# Altium PCB PCB_Anchor.PcbDoc
Units mm, origin at the board's own origin, x right, y up, seen from the top; angles counter-clockwise.
Board outline 47.5 x 51.3 mm, 2 copper layers (Top Layer, Bottom Layer), stack 1.671 mm thick; 35 components, 30 nets, 183 pads, 60 vias.
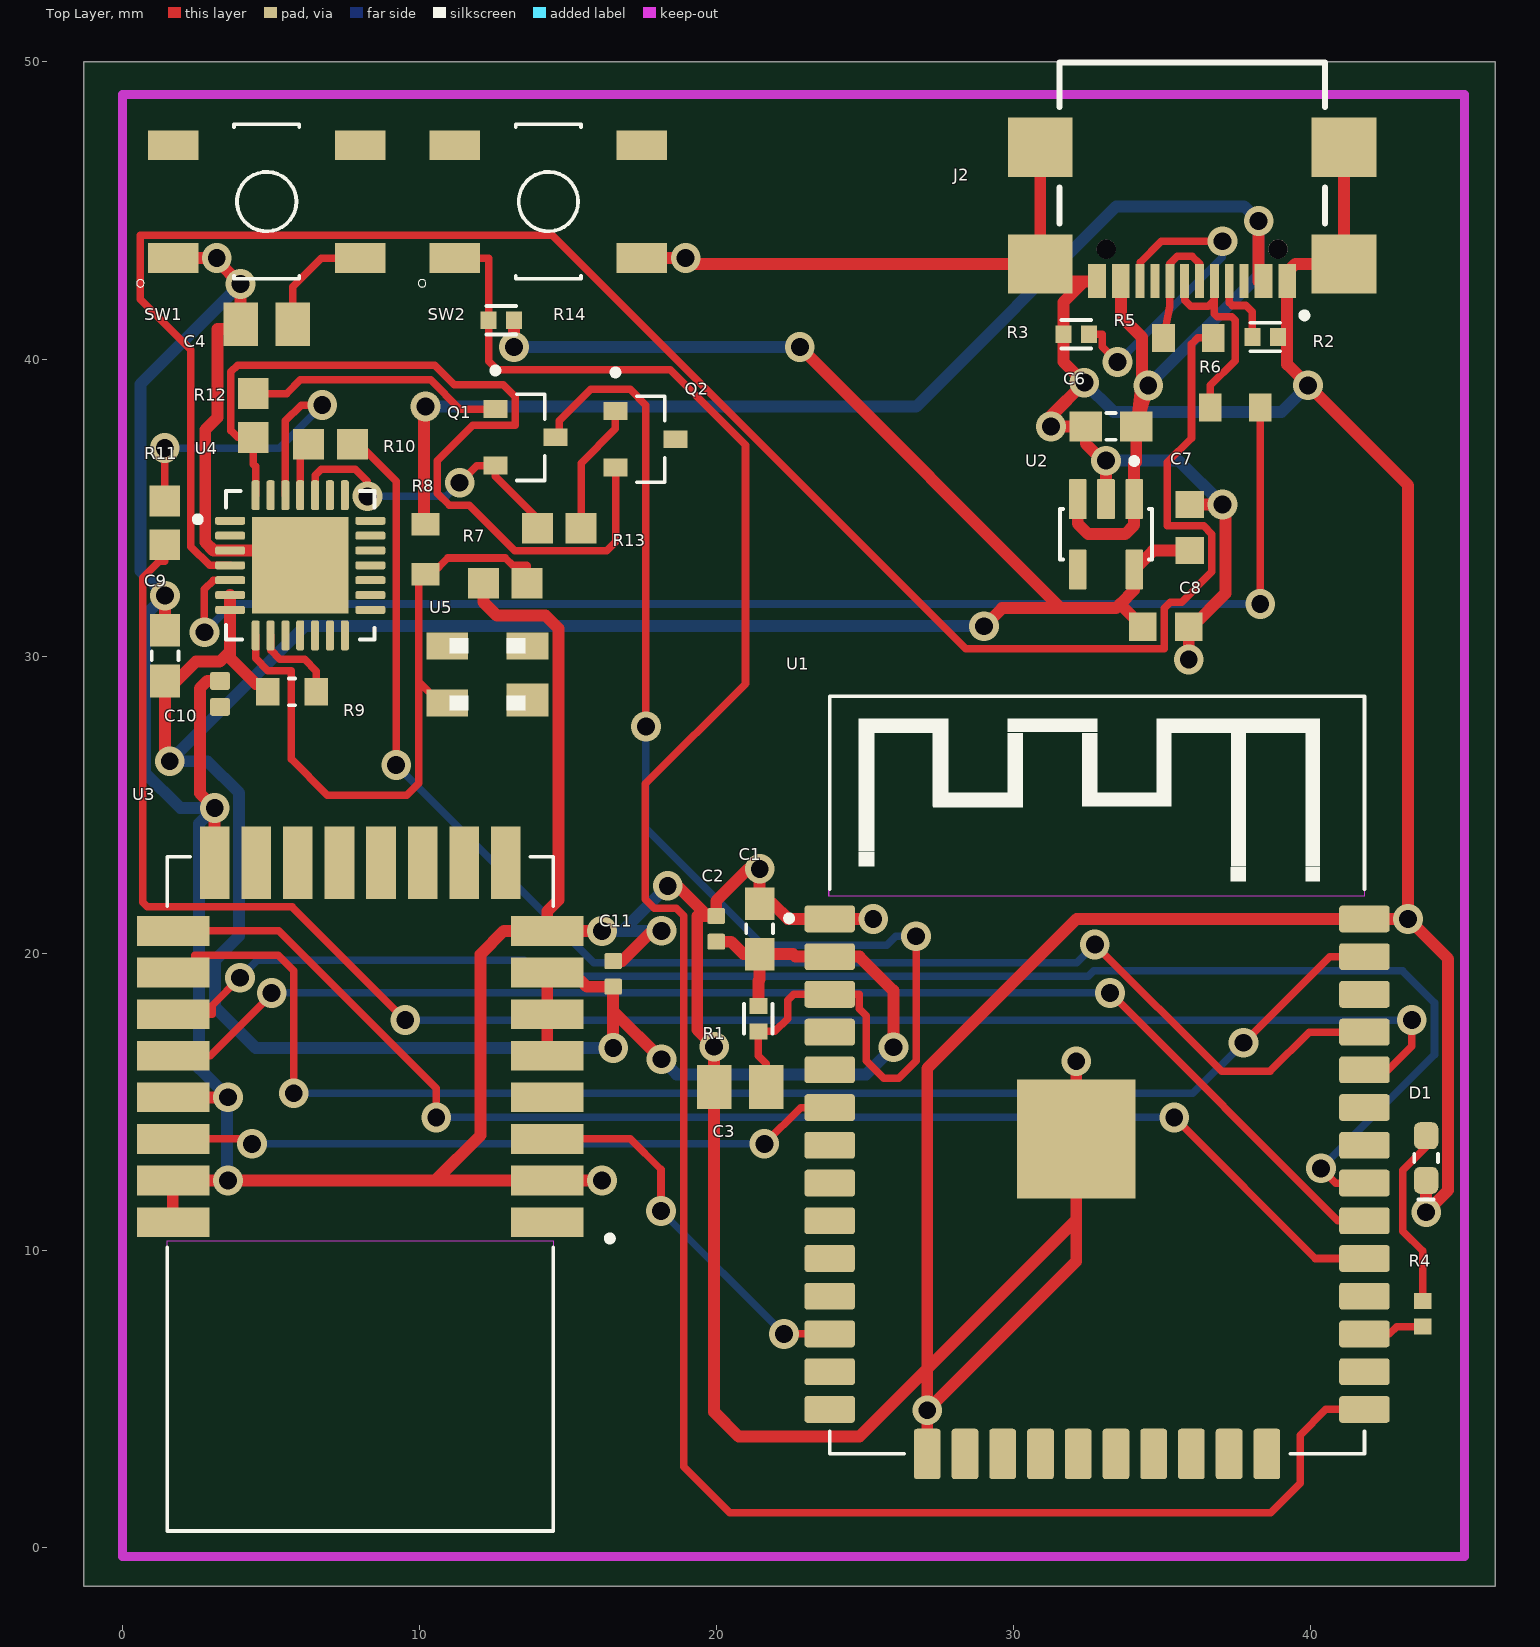
[diagram p0: Top Layer view]
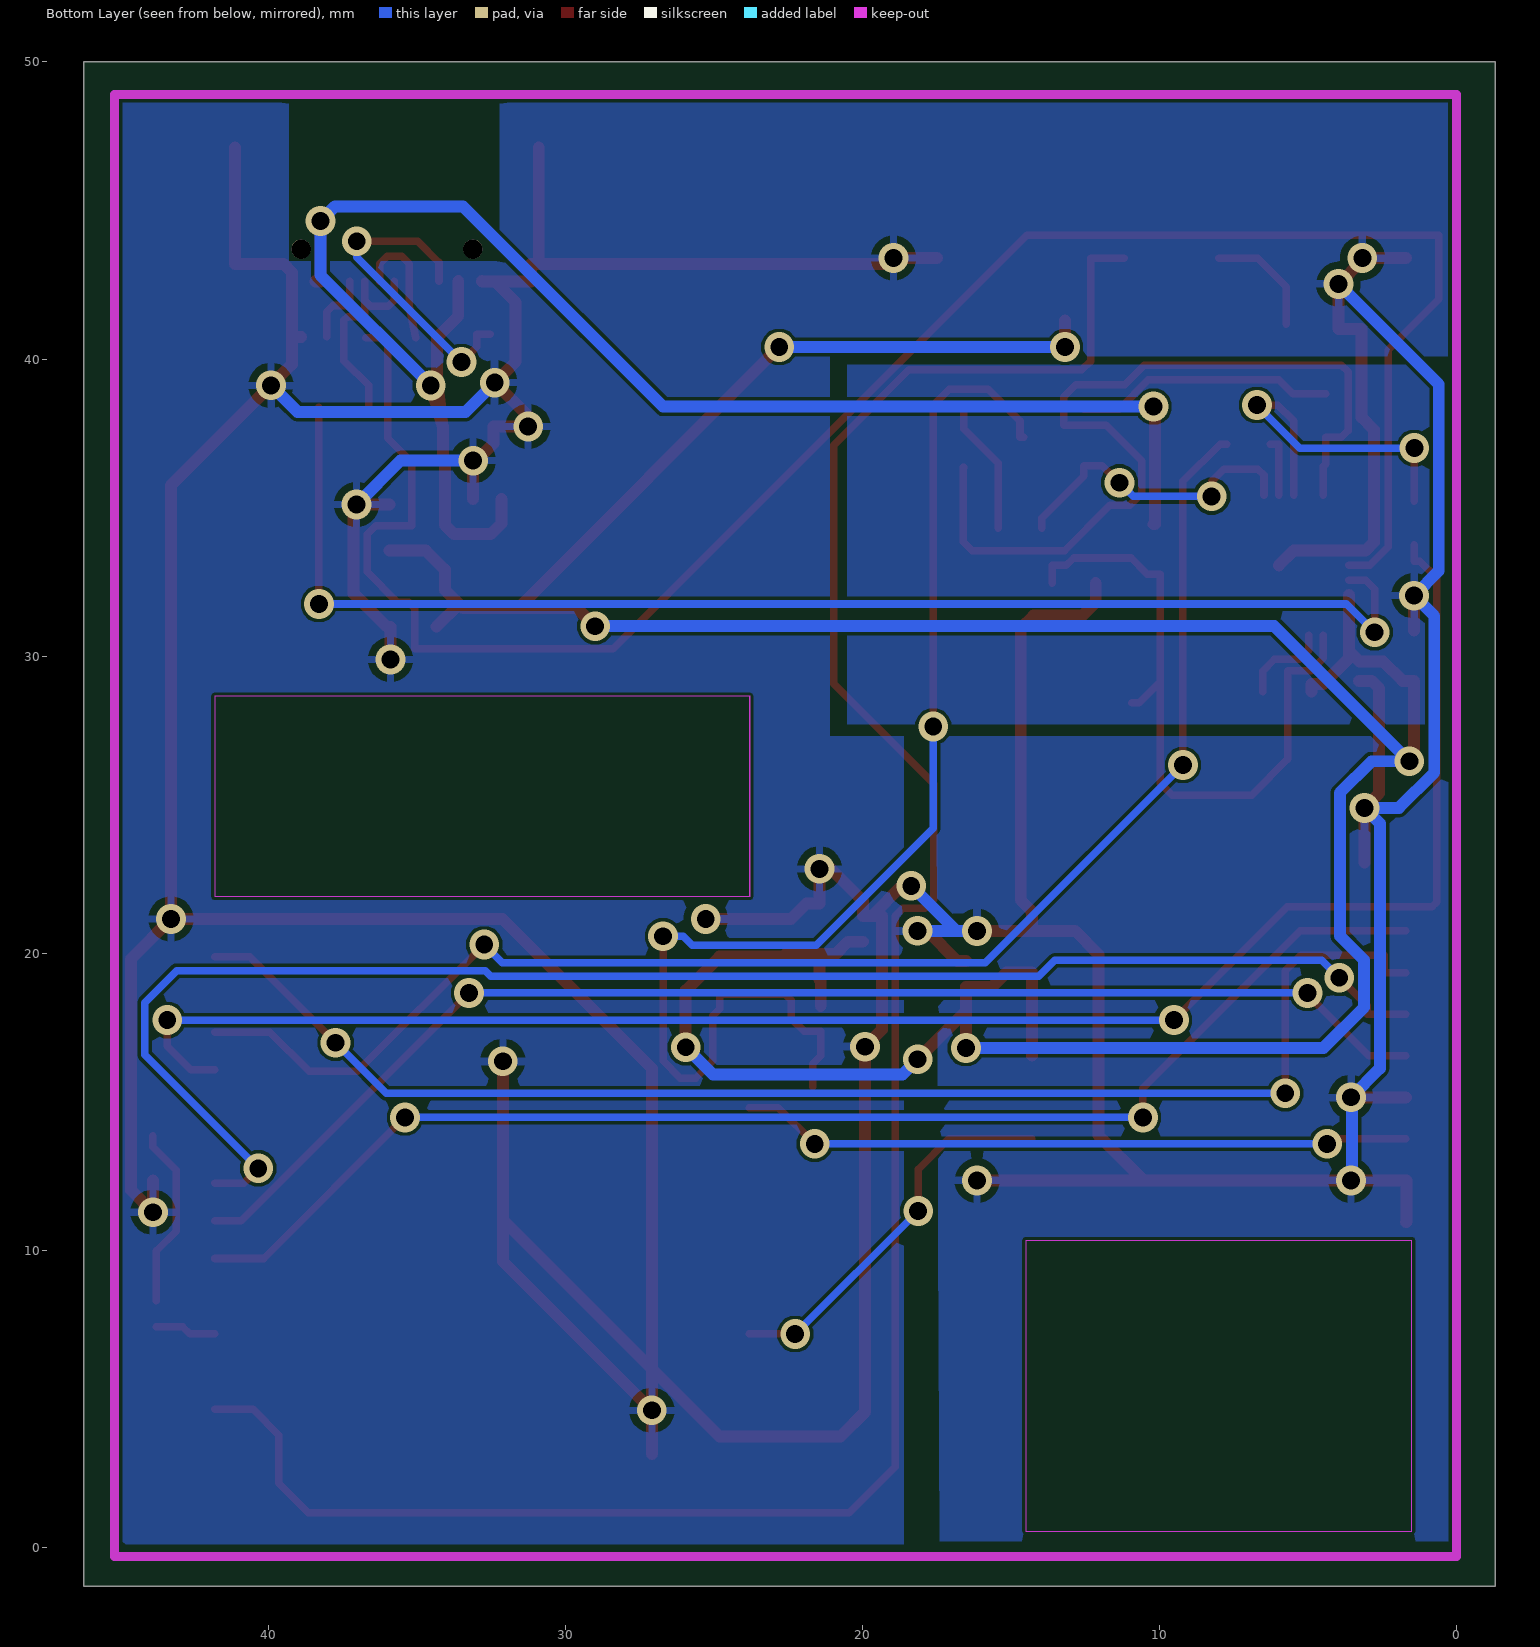
[diagram p1: Bottom Layer view, seen from below]
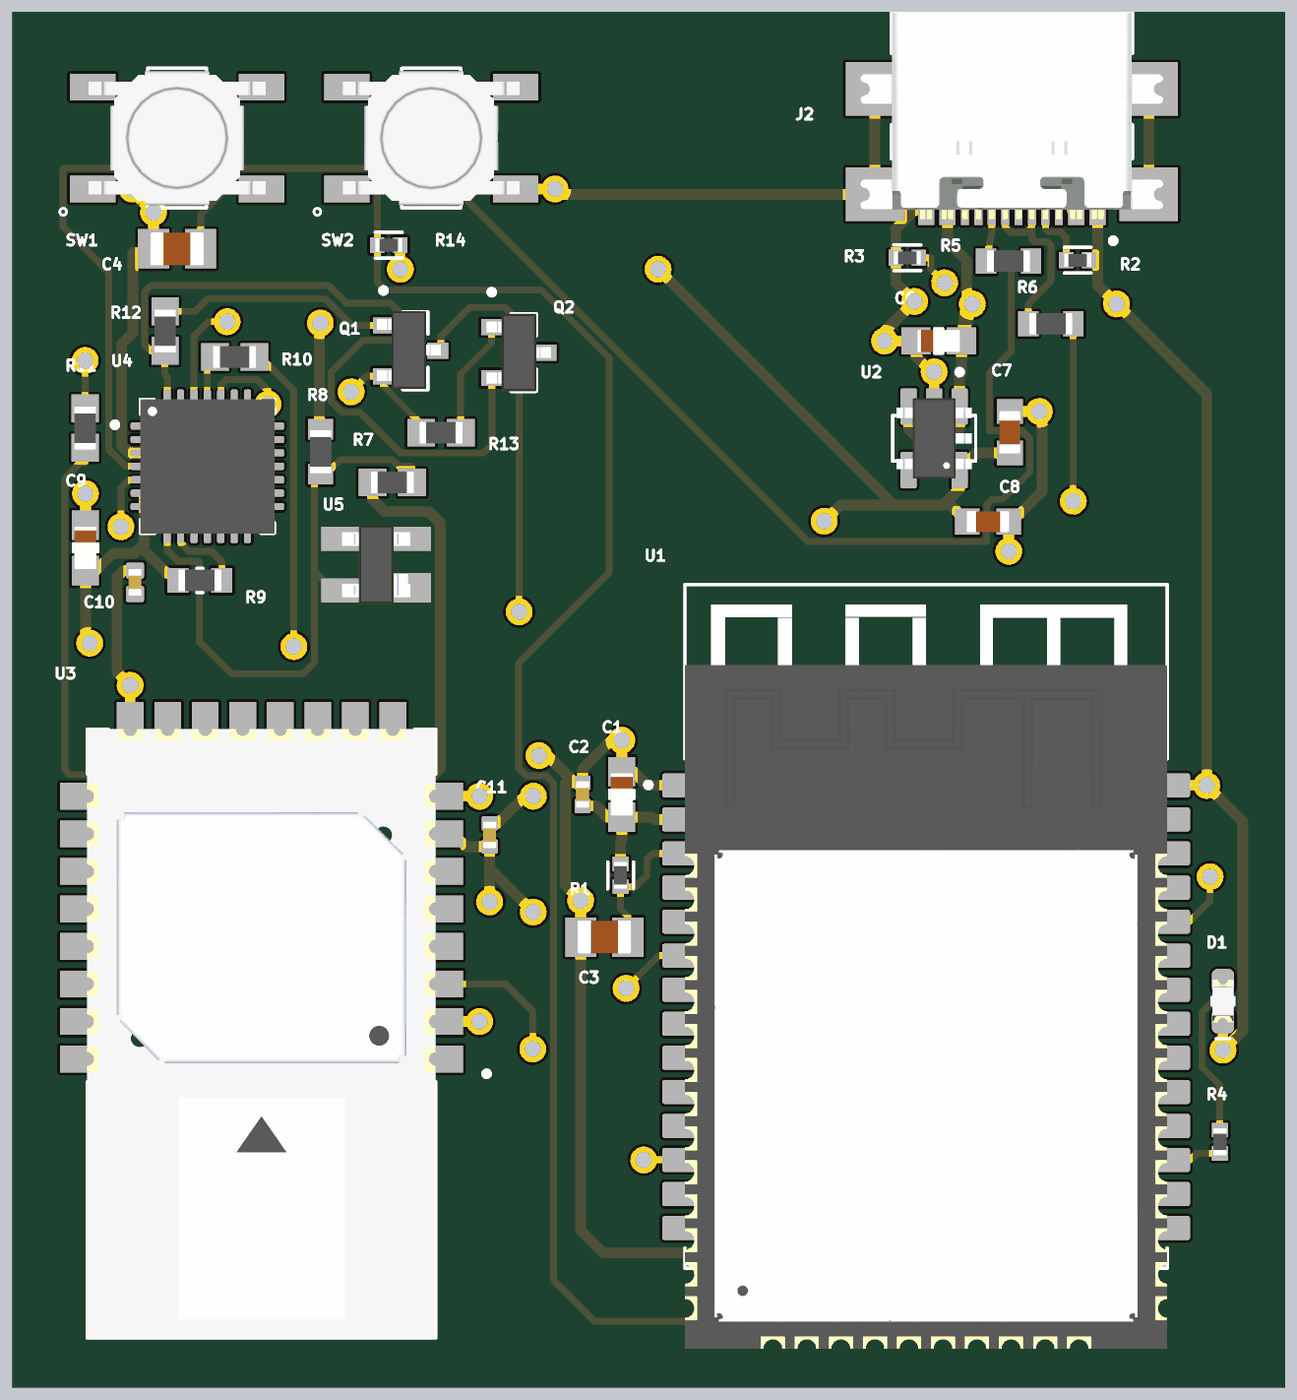
[diagram p2: 3D render of the assembled board from above, using the file's embedded part models]

## Layer stack, top to bottom
Top Solder: solder mask 0.0102, Solder Resist, Dk 3.5
Top Layer: signal copper 0.0356
Dielectric1: core 1.6, FR-4, Dk 4.8
Bottom Layer: signal copper 0.0356
Bottom Solder: solder mask 0.0102, Solder Resist, Dk 3.5

## Board outline
-1.3,-1.3 46.2,-1.3 46.2,50 -1.3,50

## Design rules (kind name [scope] priority, off if disabled: settings)
BoardOutlineClearance [All] p1: gap=0.12 ignorepadtopadclearanceinfootprint=FALSE except(0: Arc-SplitContinuation Track-SplitContinuation SMDPad-SplitContinuation THPad-SplitContinuation Via-SplitContinuation Fill-SplitContinuation Poly-SplitContinuation Region-SplitContinuation Text-SplitContinuation)
Clearance [All] p1: gap=0.12 ignorepadtopadclearanceinfootprint=FALSE except(0: Arc-Hole Track-Hole SMDPad-Hole THPad-Hole Via-Hole Fill-Hole Poly-Hole Region-Hole Text-Hole)
DiffPairsRouting DiffPair_USB_DATADiffPairsRouting [InDifferentialPairClass('USB_DATA')] p1: maxlimit=0.254 minlimit=0.254 mostfreqgap=0.254 toplayer_minwidth=0.381 toplayer_maxwidth=1.27 toplayer_prefwidth=1.27 bottomlayer_minwidth=0.381 bottomlayer_maxwidth=1.27 bottomlayer_prefwidth=1.27 maxuncoupledlength=12.7
DiffPairsRouting [All] p2: maxlimit=0.254 minlimit=0.254 mostfreqgap=0.254 toplayer_minwidth=0.381 toplayer_maxwidth=0.381 toplayer_prefwidth=0.381 bottomlayer_minwidth=0.381 bottomlayer_maxwidth=0.381 bottomlayer_prefwidth=0.381 maxuncoupledlength=12.7
HoleSize HoleSize_1 [InPadClass('Mounting_Holes')] p1: absolutevalues=TRUE maxlimit=3 minlimit=0.025 maxpercent=80.000 minpercent=20.000
HoleSize Mounting_Holes [All] p2: absolutevalues=TRUE maxlimit=2.54 minlimit=0.025 maxpercent=80.000 minpercent=20.000
MatchedLengths DiffPair_USB_DATAMatchedLengths [InDifferentialPairClass('USB_DATA')] p1: tolerance=3.048 checknetsindiffpair=TRUE checkdiffpairvsdiffpair=FALSE checkxsignals=FALSE checkothers=FALSE
MinimumSolderMaskSliver [All] p1: minsoldermaskwidth=0
PolygonConnect [All] p1: connectstyle=Relief reliefconductorwidth=0.254 reliefentries=4 polygonreliefangle="90 Angle" airgapwidth=0.254
RoomDefinition U_ESP32_Module_Anchor [InComponentClass('U_ESP32_Module_Anchor')] p1: confinementstyle=ConfineIn formatcopy=TRUE lockcomponents=FALSE outline 0.2,50.5 0.2,39.9 21,39.9 21,27.4 18.5,27.4 18.5,0 44.9,0 44.9,50.7
RoomDefinition U_USB_to_UART [InComponentClass('U_USB_to_UART')] p2: confinementstyle=ConfineIn formatcopy=TRUE lockcomponents=FALSE outline 0.291,27.585 20.54,27.585 20.54,39.895 0.291,39.986
RoomDefinition U_DWM3000_Anchor [InComponentClass('U_DWM3000_Anchor')] p3: confinementstyle=ConfineIn formatcopy=TRUE lockcomponents=FALSE outline 0.095,0.15 17.5,0.15 17.5,27.35 0.095,27.35
RoutingVias [All] p1: holewidth=0.6 width=1 viastyle="Through Hole" minholewidth=0.6 minwidth=1 maxholewidth=0.711 maxwidth=1.27
ShortCircuit ShortCircuit_ADG [InNet('AGND') vs InNet('DGND')] p1 off: allowed=TRUE
ShortCircuit [All] p2: allowed=FALSE
SilkToSolderMaskClearance SilkscreenOverComponentPads [IsPad] p1 off: minsilkscreentomaskgap=0.254 clearancetoexposedcopper=TRUE
SolderMaskExpansion [All] p1: expansion=0.102 istentingtop=FALSE
SupplyNets "Schematic Supply Nets" [InNet('V_USB')] p1: voltage=0.000
SupplyNets "Schematic Supply Nets_3" [InNet('+3.3V')] p2: voltage=0.000
SupplyNets "Schematic Supply Nets_1" [InNet('GND')] p3: voltage=0.000
Width Width_Power [InNetClass('Power')] p1: maxlimit=0.6 minlimit=0.3 preferedwidth=0.4 minimp=50.000000 maximp=50.000000 favimp=50.000000
Width [All] p2: maxlimit=0.254 minlimit=0.254 preferedwidth=0.254
25 further rules are at their usual default settings.

## Classes and differential pairs
net class Power: +3.3V GND V_USB
component class U_USB_to_UART: C9 C10 Q1 Q2 R7 R8 R9 R10 R11 R12 R13 U4 U5
component class U_ESP32_Module_Anchor: C1 C2 C3 C4 C6 C7 C8 D1 J2 R1 R2 R3 R4 R5 R6 R14 SW1 SW2 U1 U2
component class U_DWM3000_Anchor: C11 U3

## Components (designator, comment, footprint, x,y, rotation, side; value= is the part's Value field where it differs from the comment)
C1 "Cap" CAPC1608X90 21.444,20.82 r270 top value=10uF
C2 "Cap" CAPC1005X55N 19.982,20.82 r270 top value=100nF
C3 "Cap" CAPC2012X94N 20.791,15.499 r0 top value=0.1uF/50V(10%)
C4 "Cap" CAPC2012X94N 4.85,41.169 r0 top value=0.1uF/50V(10%)
C6 "Cap" CAPC1608X90 33.27,37.732 r0 top value=10uF
C7 "Cap" CAPC1608X87N 35.919,34.328 r270 top value=10nF
C8 "Cap" CAPC1608X87N 35.11,30.991 r180 top value=10nF
C9 "Cap" CAPC1608X90 1.43,30.016 r270 top value="0.1uF/50V (10%)"
C10 "Cap" CAPC1005X65N 3.28,28.729 r270 top value="4.7uF/6.3V (10%)"
C11 "Cap" CAPC1005X55N 16.514,19.306 r270 top value=0.1uF
D1 "597-3326-607F" LEDSC160X80X70L45N 43.877,13.107 r90 top
J2 "USB4110GFA" GCT_USB4110GFA 36,43.7 r180 top
Q1 "SS8050-G" TRANS_SS8050-G 13.56,37.365 r0 top
Q2 "SS8050-G" TRANS_SS8050-G 17.6,37.3 r0 top
R1 "Res1" RESC1005X40 21.4,17.8 r90 top value="10k (5%)"
R2 "Res1" RESC1005X40 38.456,40.744 r180 top value=5.1k
R3 "Res1" RESC1005X40 32.098,40.835 r180 top value=5.1k
R4 "Res1" RESC1005X40N 43.762,7.866 r90 top value=220
R5 "Res1" RESC1608X60N 35.875,40.709 r180 top value=27
R6 "Res1" RESC1608X60N 37.453,38.374 r180 top value=27
R7 "Res1" RESC1607X60N 12.88,32.456 r0 top value="47.5k (5%)"
R8 "Res1" RESC1608X60N 10.2,33.6 r270 top value="22.1k (5%)"
R9 "Res1" RESC1608X55N 5.7,28.8 r180 top value="2k (5%)"
R10 "Res1" RESC1607X60N 6.998,37.133 r0 top value="0R (5%)"
R11 "Res1" RESC1607X60N 1.42,34.484 r270 top value="0R (5%)"
R12 "Res1" RESC1607X60N 4.4,38.1 r270 top value="10k (5%)"
R13 "Res1" RESC1607X60N 14.696,34.309 r180 top value="10k (5%)"
R14 "Res1" RESC1005X40 12.748,41.305 r0 top value="10k (5%)"
SW1 "SW-PB" SW_TL3342F160QG 4.85,45.3 r0 top
SW2 "SW-PB" SW_TL3342F160QG 14.333,45.3 r0 top
U1 "ESP-WROOM-32" MODULE_ESP-WROOM-32 32.8,12.9 r0 top
U2 "AP2112K-3.3TRG1" SOT95P285X140-5N 33.1,34.1 r270 top
U3 "DWM3000TR13" XCVR_DWM3000TR13 8,11.9 r180 top
U4 "CP2102N-A01-GQFN28" QFN50P500X500X80-29N 5.98,33.056 r0 top
U5 "SP0503BAHT" SOT143 12.28,29.385 r180 top

## Footprints (in the part's own frame and the unit in brackets; to place one, negate y for a bottom-side part, rotate by r counter-clockwise, add the part's x,y. Pads: shape width x height; smd on the part's side, far side on the other; paste and mask are expansions set on the pad)
CAPC1005X55N [mm]
  rrect25% 0.54x0.6 smd: 1(-0.432,0) 2(0.432,0)
  body extent -0.5,-0.25 0.5,0.25, height 0.55
CAPC1005X65N [mm]
  rrect25% 0.6x0.67 smd: 1(-0.437,0) 2(0.437,0)
  body extent -0.5,-0.25 0.5,0.25, height 0.65
CAPC1608X87N [mm]
  rect 0.92x0.97 smd: 1(-0.775,0) 2(0.775,0)
  body extent -0.8,-0.4 0.8,0.4, height 0.87
CAPC1608X90 [mm]
  rect 1.1x1 smd: 1(-0.85,0) 2(0.85,0)
  silkscreen extent -0.15,-0.45 0.15,0.45, body extent -0.8,-0.43 0.8,0.43, height 1
CAPC2012X94N [mm]
  rect 1.16x1.47 smd: 1(-0.88,0) 2(0.88,0)
  body extent -1,-0.63 1,0.63, height 0.94
GCT_USB4110GFA [mm]
  rect 0.6x1.15 smd: A1/B12(-3.2,1.075) A4/B9(-2.4,1.075) B1/A12(3.2,1.075) B4/A9(2.4,1.075)
  rect 0.3x1.15 smd: A5(-1.25,1.075) A6(-0.25,1.075) A7(0.25,1.075) A8(1.25,1.075) B5(1.75,1.075) B6(0.75,1.075) B7(-0.75,1.075) B8(-1.75,1.075)
  rect 2.18x2 smd: S1(-5.11,0.5) S2(5.11,0.5) S3(-5.11,-3.43) S4(5.11,-3.43)
  round 0.65 hole 0.65 unplated: ""(-2.89,0) ""(2.89,0)
  silkscreen extent -4.47,-6.28 4.47,2.33, body extent -5.65,-6.28 5.65,1.42, height 3.26
LEDSC160X80X70L45N [mm]
  rrect53% 0.91x0.83 smd: A(0.75,0) C(-0.75,0)
  silkscreen extent -1.4,-0.4 0.14,0.4, body extent -0.8,-0.4 0.8,0.4, height 0.7
MODULE_ESP-WROOM-32 [mm]
  rrect22% 1.7x0.9 smd: 1(-9,8.255) 2(-9,6.985) 3(-9,5.715) 4(-9,4.445) 5(-9,3.175) 6(-9,1.905) 7(-9,0.635) 8(-9,-0.635) 9(-9,-1.905) 10(-9,-3.175) 11(-9,-4.445) 12(-9,-5.715) 13(-9,-6.985) 14(-9,-8.255) 25(9,-8.255) 26(9,-6.985) 27(9,-5.715) 28(9,-4.445) 29(9,-3.175) 30(9,-1.905) 31(9,-0.635) 32(9,0.635) 33(9,1.905) 34(9,3.175) 35(9,4.445) 36(9,5.715) 37(9,6.985) 38(9,8.255)
  rect 4x4 smd: 1.1(-0.7,0.845)
  rrect22% 0.9x1.7 smd: 15(-5.715,-9.755) 16(-4.445,-9.755) 17(-3.175,-9.755) 18(-1.905,-9.755) 19(-0.635,-9.755) 20(0.635,-9.755) 21(1.905,-9.755) 22(3.175,-9.755) 23(4.445,-9.755) 24(5.715,-9.755)
  Keep-Out Layer region: 9,9.012 -9.012,9.012 -9.012,15.75 9,15.75
  Keep-Out Layer region: 9,9.026 -9.026,9.026 -9.026,15.75 9,15.75
  silkscreen extent -10.46,-9.75 9,15.75, body extent -9,-12.75 9,12.75, height 3.25
QFN50P500X500X80-29N [mm]
  rrect50% 1.01x0.27 smd: 1(-2.36,1.5) 2(-2.36,1) 3(-2.36,0.5) 4(-2.36,0) 5(-2.36,-0.5) 6(-2.36,-1) 7(-2.36,-1.5) 15(2.36,-1.5) 16(2.36,-1) 17(2.36,-0.5) 18(2.36,0) 19(2.36,0.5) 20(2.36,1) 21(2.36,1.5)
  rrect50% 0.27x1.01 smd: 8(-1.5,-2.36) 9(-1,-2.36) 10(-0.5,-2.36) 11(0,-2.36) 12(0.5,-2.36) 13(1,-2.36) 14(1.5,-2.36) 22(1.5,2.36) 23(1,2.36) 24(0.5,2.36) 25(0,2.36) 26(-0.5,2.36) 27(-1,2.36) 28(-1.5,2.36)
  rect 3.25x3.25 smd paste-3: 29(0,0)
  silkscreen extent -3.55,-2.5 2.5,2.5, body extent -2.5,-2.5 2.5,2.5, height 0.38
RESC1005X40 [mm]
  rect 0.54x0.6 smd: 1(-0.43,0) 2(0.43,0)
  silkscreen extent -0.5,-0.48 0.5,0.48, body extent -0.5,-0.25 0.5,0.25, height 0.4
RESC1005X40N [mm]
  rect 0.54x0.6 smd: 1(-0.432,0) 2(0.432,0)
  body extent -0.5,-0.25 0.5,0.25, height 0.4
RESC1607X60N [mm]
  rect 1.04x1.02 smd: 1(-0.735,0) 2(0.735,0)
  body extent -0.8,-0.4 0.8,0.4, height 0.55
RESC1608X55N [mm]
  rect 0.79x0.93 smd paste+0 mask+0.102: 1(-0.82,0) 2(0.82,0)
  silkscreen extent -0.11,-0.45 0.11,0.45, body extent -0.8,-0.4 0.8,0.4, height 0.55
RESC1608X60N [mil]
  rect 30x37 smd: 1(-33,0) 2(33,0)
  body extent -31,-16 31,16, height 22
SOT95P285X140-5N [mm]
  rrect15% 1.35x0.6 smd: 1(-1.185,0.95) 2(-1.185,0) 3(-1.185,-0.95) 4(1.185,-0.95) 5(1.185,0.95)
  silkscreen extent -2.57,-1.55 0.85,1.55, body extent -1.5,-1.4 1.5,1.4, height 1.4
SOT143 [mm]
  rect 1.4x1.1 smd paste-2 mask+0: 1(-1.35,0.86)
  rect 1.4x0.9 smd paste-2 mask+0: 2(-1.35,-0.96) 3(1.35,-0.96) 4(1.35,0.96)
  silkscreen extent -1.28,-1.21 1.28,1.21, body extent -1.18,-1.46 1.18,1.46, height 1.22
SW_TL3342F160QG [mm]
  rect 1.7x1 smd paste+0 mask+0.102: 1(-3.15,-1.9) 2(3.15,-1.9) 3(-3.15,1.9) 4(3.15,1.9)
  silkscreen extent -4.38,-2.88 1.1,2.6, body extent -3.3,-2.5 3.3,2.5, height 1.46
TRANS_SS8050-G [mm]
  rect 0.8x0.6 smd: 1(-1.01,0.95) 2(-1.01,-0.95) 3(1.01,0)
  silkscreen extent -1.11,-1.45 0.65,2.35, body extent -1.26,-1.41 1.14,1.48, height 1.14
XCVR_DWM3000TR13 [mm]
  rect 2.45x1 smd: 1(-6.295,0.95) 2(-6.295,-0.45) 3(-6.295,-1.85) 4(-6.295,-3.25) 5(-6.295,-4.65) 6(-6.295,-6.05) 7(-6.295,-7.45) 8(-6.295,-8.85) 17(6.295,-8.85) 18(6.295,-7.45) 19(6.295,-6.05) 20(6.295,-4.65) 21(6.295,-3.25) 22(6.295,-1.85) 23(6.295,-0.45) 24(6.295,0.95)
  rect 1x2.45 smd: 9(-4.9,-11.145) 10(-3.5,-11.145) 11(-2.1,-11.145) 12(-0.7,-11.145) 13(0.7,-11.145) 14(2.1,-11.145) 15(3.5,-11.145) 16(4.9,-11.145)
  Keep-Out Layer region: 6.5,1.575 -6.5,1.575 -6.5,11.35 6.5,11.35
  Keep-Out Layer region: 6.5,1.575 -6.5,1.575 -6.5,11.35 6.5,11.35
  silkscreen extent -8.5,-11.35 6.5,11.35, body extent -6.5,-11.35 6.5,11.35, height 2.89

## Part data
C1 C2 C3 C4 C6 C7 C8 C9 C10 C11: "Capacitor", LatestRevisionDate=17-Jul-2002, LatestRevisionNote="Re-released for DXP Platform.", PackageDescription="Radial Cap, Thru-Hole; 2 Leads; 0.3 in Pin Spacing", PackageReference=RAD-0.3, Published=8-Jun-2000, Publisher="Altium Limited"
D1: "SMD LED 0603 INGAN GREEN", Package="0603 Dialight", Check_prices=https://www.snapeda.com/parts/597-3326-607F/Dialight/view-part/?ref=eda, MF=Dialight, MP=597-3326-607F, SnapEDA_Link=https://www.snapeda.com/parts/597-3326-607F/Dialight/view-part/?ref=snap
J2: "USB-C (USB TYPE-C) USB 2.0 Receptacle Connector 24 (16+8 Dummy) Position Surface Mount, Right Angle", Package=None, Check_prices=https://www.snapeda.com/parts/USB4110GFA/Global+Connector+Technology/view-part/?ref=eda, MF="Global Connector Technology", MP=USB4110GFA, SnapEDA_Link=https://www.snapeda.com/parts/USB4110GFA/Global+Connector+Technology/view-part/?ref=snap
Q1 Q2: "Bipolar (BJT) Transistor NPN 25 V 1.5 A 100MHz 300 mW Surface Mount SOT-23-3", Package=None, Check_prices=https://www.snapeda.com/parts/SS8050G/Comchip/view-part/?ref=eda, Digi-Key_Part_Number=641-1790-2-ND, MF=Comchip, MP=SS8050G, SnapEDA_Link=https://www.snapeda.com/parts/SS8050G/Comchip/view-part/?ref=snap
R1 R2 R3 R4 R5 R6 R7 R8 R9 R10 R11 R12 R13 R14: "Resistor", LatestRevisionDate=17-Jul-2002, LatestRevisionNote="Re-released for DXP Platform.", PackageDescription="Axial Device, Thru-Hole; 2 Leads; 0.3 in Pin Spacing", PackageReference=AXIAL-0.3, Published=8-Jun-2000, Publisher="Altium Limited"
SW1 SW2: "Switch", LatestRevisionDate=17-Jul-2002, LatestRevisionNote="Re-released for DXP Platform.", PackageDescription="Switch; 2 Leads", PackageReference=SPST-2, Published=24-Mar-1999, Publisher="Altium Limited"
U1: "Transceptor serie ESP-WROOM-32; Placa de evaluaciÃ³n 802.11 b/g/n (Wi-Fi, WiFi, WLAN), BluetoothÂ® Smart 4.x de bajo consumo (BLE)", Package="Module Espressif Systems", Check_prices=https://www.snapeda.com/parts/ESP-WROOM-32/Espressif+Systems/view-part/?ref=eda, MF="Espressif Systems", MP=ESP-WROOM-32, SnapEDA_Link=https://www.snapeda.com/parts/ESP-WROOM-32/Espressif+Systems/view-part/?ref=snap
U2: "Linear Voltage Regulator IC Positive Fixed 1 Output 600mA SOT-25", Package="SOT-753 Diodes Inc.", Availability="In Stock", Check_prices=https://www.snapeda.com/parts/AP2112K-3.3TRG1/Diodes+Inc./view-part/?ref=eda, MF="Diodes Inc.", MP=AP2112K-3.3TRG1, Price=None, Purchase-URL=https://pricing.snapeda.com/search/part/AP2112K-3.3TRG1/?ref=eda, SnapEDA_Link=https://www.snapeda.com/parts/AP2112K-3.3TRG1/Diodes+Inc./view-part/?ref=snap
U3: "802.15.4, Bluetooth, Cellular UWB, ZigbeeÂ® Transceiver Module 6.25GHz ~ 8.25GHz Integrated, Ceramic Patch Surface Mount", Package=None, Check_prices=https://www.snapeda.com/parts/DWM3000TR13/Qorvo/view-part/?ref=eda, MF=Qorvo, MP=DWM3000TR13, SnapEDA_Link=https://www.snapeda.com/parts/DWM3000TR13/Qorvo/view-part/?ref=snap
U4: "USB Bridge, USB to UART USB 2.0 UART Interface 28-QFN (5x5)", Package="QFN-28 Silicon Labs", Availability="In Stock", Check_prices=https://www.snapeda.com/parts/CP2102N-A01-GQFN28/Silicon+Labs/view-part/?ref=eda, MF="Silicon Labs", MP=CP2102N-A01-GQFN28, Price=None, Purchase-URL=https://pricing.snapeda.com/search/part/CP2102N-A01-GQFN28/?ref=eda, SnapEDA_Link=https://www.snapeda.com/parts/CP2102N-A01-GQFN28/Silicon+Labs/view-part/?ref=snap
U5: "ESD Suppressors / TVS Diodes TVS AVAL DIODE SMT", Package="SOT-143 Littelfuse", Check_prices=https://www.snapeda.com/parts/SP0503BAHT/Ersa/view-part/?ref=eda, MF=Littelfuse, MP=SP0503BAHT, SnapEDA_Link=https://www.snapeda.com/parts/SP0503BAHT/Ersa/view-part/?ref=snap

## Via types
v1: diameter 1, hole 0.6, Top Layer to Bottom Layer, 60 vias

## Nets (pads, with @x,y where several pads share a name; then routed paths per layer and width w, separated by ;. In a path a pad name is that pad's centre, name@x,y a point inside that pad or via, vN(x,y) a via of type N, cw(c..) or ccw(c..) an arc to the next point about the centre after c; other vN are vias at no path point)
+3.3V: C1.2 C2.2 C7.2 C8.2 C9.2 C11.2 R1.2 R9.2 R14.2 U1.2 U2.5 U3.5 U3.6 U3.7 U4.6 U4.7 | length 123.7
  Top Layer w0.4: v1(1.588,26.462) 1.43,26.62 C9.2 1.816,29.166 2.465,29.815 3.264,29.815 3.62,30.171 ; U4.6 U4.7 3.62,30.171 ; R9.2 4.88,29.065 4.483,29.065 3.62,29.929 3.62,30.171 ; v1(13.178,40.407) R14.2 ; U3.5 U3.6 U3.7 15.151,19.35 15.627,18.874 C11.2 16.514,18.055 ; v1(16.514,16.81) 16.514,18.055 ; v1(18.139,16.429) 16.514,18.055 ; C2.2 20.485,20.388 20.903,19.97 C1.2 ; R1.2 21.4,19.071 21.444,19.115 C1.2 ; v1(22.797,40.407) 31.585,31.618 ; v1(25.946,16.836) 25.946,18.742 24.803,19.885 U1.2 22.653,19.885 22.568,19.97 C1.2 ; v1(28.994,31.009) 29.604,31.618 31.585,31.618 ; C8.2 33.574,31.752 ; C7.2 34.688,33.553 U2.5 34.05,32.228 33.574,31.752 ; 31.585,31.618 33.44,31.618 33.574,31.752
  Bottom Layer w0.4: v1(13.178,40.407) v1(22.797,40.407) ; v1(16.514,16.81) 4.483,16.81 3.111,18.182 3.111,19.769 3.924,20.582 3.924,25.395 2.858,26.462 v1(1.588,26.462) 6.134,31.009 v1(28.994,31.009) ; v1(18.139,16.429) 18.647,15.921 25.032,15.921 v1(25.946,16.836)
DTR: Q2.2 R12.2 U4.28 | length 29.5
  Top Layer w0.254: U4.28 4.48,36.383 4.4,36.463 R12.2 3.874,37.365 3.643,37.596 3.643,39.567 3.874,39.797 10.503,39.797 11.163,39.137 12.814,39.137 13.221,38.73 13.221,37.765 11.792,37.765 10.598,36.571 10.598,35.479 11.004,35.073 11.671,35.073 13.195,33.549 16.294,33.549 16.599,33.854 16.599,36.35 Q2.2
EN: C4.2 SW1.2 | length 3.9
  Top Layer w0.254: C4.2 5.73,42.437 6.693,43.4 SW1.2
GND: C1.1 C2.1 C3.1 C4.1 C6.1 C7.1 C8.1 C9.1 C10.1 C11.1 D1.C J2.A1/B12 J2.B1/A12 J2.S1 J2.S2 J2.S3 J2.S4 R2.1 R3.2 R7.1 SW1.1 SW2.2 U1.1 U1.1.1 U1.15 U1.38 U2.2 U3.2 U3.8 U3.16 U3.21 U3.23 U3.24 U4.3 U4.29 | length 287.6
  Top Layer w0.4: C9.1 v1(1.43,32.036) ; SW1.1 v1(3.17,43.4) 3.17,43.324 v1(3.97,42.524) C4.1 3.97,41.016 3.196,41.016 3.196,38.035 2.781,37.621 2.781,33.835 3.061,33.556 U4.3 5.48,33.556 U4.29 ; U3.24 1.689,10.95 1.689,12.35 U3.23 v1(3.55,12.35) 7.988,12.35 10.528,12.35 ; U3.21 v1(3.55,15.15) ; U3.16 v1(3.1,24.89) 2.604,25.386 2.604,28.912 2.858,29.166 C10.1 ; R7.1 12.145,31.822 12.602,31.364 14.237,31.364 14.669,30.933 14.669,21.789 14.295,21.415 U3.8 ; v1(16.14,12.35) U3.2 10.528,12.35 ; v1(16.14,20.75) U3.8 ; C11.1 16.805,19.738 17.821,20.754 v1(18.143,20.754) ; SW2.2 v1(18.953,43.4) 19.153,43.2 J2.S2 ; v1(18.352,22.268) 18.674,22.268 C2.1@19.69,21.252 ; v1(25.27,21.155) U1.1 22.397,21.155 21.882,21.67 C1.1 v1(21.444,22.84) 21.059,22.84 19.982,21.763 C2.1 C2.1@19.69,21.252 ; U1.15 v1(27.085,4.615) ; J2.S4 J2.S2 ; v1(32.1,16.365) U1.1.1 32.1,11.026 ; J2.B1/A12 32.8,42.617 32.372,42.617 ; U2.2 v1(33.1,36.58) 32.996,36.58 32.42,37.156 C6.1 v1(31.25,37.732) 31.25,38.083 v1(32.372,39.206) 31.668,39.91 R3.2 31.668,41.913 32.372,42.617 ; v1(35.885,29.886) C8.1 36.005,30.991 37.122,32.108 37.122,35.103 v1(37.024,35.103) C7.1 ; R2.1 39.2,40.744 ; J2.S3 J2.S1 39.479,43.2 39.2,42.921 J2.A1/B12 39.2,40.744 ; D1.C v1(43.877,11.282) 44.615,12.021 44.615,19.81 v1(43.27,21.155) ; 10.528,12.35 12.052,13.874 12.052,19.965 12.837,20.75 U3.8 ; C2.1@19.69,21.252 19.342,21.252 19.342,17.423 v1(19.911,16.854) C3.1 19.911,4.557 20.739,3.729 24.803,3.729 27.085,6.011 ; v1(27.085,4.615) 27.085,6.011 ; v1(27.085,4.615) 32.1,9.63 32.1,11.026 ; 27.085,6.011 32.1,11.026 ; 27.085,6.011 27.085,16.122 32.118,21.155 U1.38 v1(43.27,21.155) ; J2.S2 31.153,43.2 31.153,42.617 32.372,42.617 ; 39.2,40.744 39.2,39.818 v1(39.904,39.114) 43.27,35.748 v1(43.27,21.155)
  Bottom Layer w0.4: v1(3.55,12.35) 3.518,12.382 3.518,15.118 v1(3.55,15.15) 2.578,16.122 2.578,24.368 v1(3.1,24.89) 1.941,24.89 0.749,26.081 0.749,31.356 v1(1.43,32.036) 0.597,32.869 0.597,39.151 v1(3.97,42.524) ; v1(16.14,20.75) 16.834,20.75 ; v1(18.143,20.754) 18.14,20.75 16.834,20.75 ; v1(18.352,22.268) 16.834,20.75 ; v1(32.372,39.206) 33.356,38.222 39.012,38.222 v1(39.904,39.114) ; v1(33.1,36.58) 35.548,36.58 v1(37.024,35.103)
NetC3_2: C3.2 Q1.3 R1.1 U1.3 | length 44.3
  Top Layer w0.254: Q1.3 14.694,37.365 14.694,37.918 15.761,38.984 17.082,38.984 17.615,38.451 v1(17.615,27.631) ; C3.2 21.671,16.277 21.4,16.548 R1.1 21.958,17.37 22.39,17.802 22.39,18.41 22.595,18.615 U1.3 24.803,18.615 24.803,18.131 25.032,17.902 25.032,16.378 25.616,15.794 26.124,15.794 26.708,16.378 v1(26.708,20.569)
  Bottom Layer w0.254: v1(17.615,27.631) 17.615,24.202 21.552,20.265 25.718,20.265 26.022,20.569 v1(26.708,20.569)
NetD1_A: D1.A R4.2 | length 6.2
  Top Layer w0.254: R4.2 43.762,9.978 43.091,10.648 43.091,12.695 43.877,13.481 D1.A
NetJ2_A5: J2.A5 R2.2 | length 2.5
  Top Layer w0.254: J2.A5 37.25,41.904 37.351,41.803 37.808,41.803 38.026,41.585 R2.2
NetJ2_A6: J2.A6 J2.B6 R5.2 | length 4.3
  Top Layer w0.254: R5.2 35.25,41.763 J2.B6 35.25,43.201 35.504,43.455 35.996,43.455 36.25,43.201 J2.A6
NetJ2_A7: J2.A7 J2.B7 R6.2 | length 7
  Top Layer w0.254: J2.A7 35.75,41.982 35.953,41.778 36.547,41.778 36.75,41.982 ; R6.2 36.615,39.112 37.452,39.95 37.452,41.305 37.328,41.429 36.85,41.429 36.75,41.529 36.75,41.982 ; J2.B7 36.75,41.982
NetJ2_B5: J2.B5 R3.1 | length 10.8
  Top Layer w0.254: R3.1 32.982,40.835 32.982,40.407 v1(33.49,39.899) ; J2.B5 34.25,43.25 34.963,43.963 v1(37.021,43.963)
  Bottom Layer w0.254: v1(33.49,39.899) 37.021,43.429 v1(37.021,43.963)
NetQ1_1: Q1.1 R12.1 | length 8.7
  Top Layer w0.254: R12.1 5.518,38.835 5.98,39.297 10.374,39.297 11.355,38.315 Q1.1
NetQ2_1: Q2.1 R13.1 | length 4.4
  Top Layer w0.254: R13.1 15.431,36.496 16.59,37.655 Q2.1
NetR4_1: R4.1 U1.27 | length 2.1
  Top Layer w0.254: U1.27 42.634,7.185 42.883,7.434 R4.1
NetR5_1: R5.1 U4.4 | length 66.6
  Top Layer w0.254: U4.4 2.929,33.056 2.299,33.686 2.299,40.305 0.597,42.007 0.597,44.166 14.465,44.166 28.385,30.247 35.065,30.247 35.065,31.618 35.268,31.822 35.649,31.822 36.665,32.838 36.665,34.108 36.386,34.387 35.166,34.387 35.166,36.521 35.979,37.333 35.979,40.506 36.182,40.709 R5.1
NetR6_1: R6.1 U4.5 | length 45
  Top Layer w0.254: v1(2.756,30.806) 2.756,32.251 3.061,32.556 U4.5 ; v1(38.291,31.756) R6.1
  Bottom Layer w0.254: v1(2.756,30.806) 3.706,31.756 v1(38.291,31.756)
NetR7_2: R7.2 R8.2 U4.8 U5.4 | length 23
  Top Layer w0.254: U4.8 4.48,29.922 4.89,29.512 5.677,29.512 5.677,26.538 6.896,25.319 9.563,25.319 9.97,25.726 9.97,29.244 ; U5.4 10.68,28.425 9.97,29.135 9.97,29.244 ; R7.2 13.615,33.041 13.601,33.055 13.136,33.055 12.888,33.303 10.945,33.303 10.404,32.762 R8.2 9.97,32.762 9.97,29.244
NetR9_1: R9.1 U4.9 | length 3
  Top Layer w0.254: U4.9 4.98,30.207 5.296,29.891 6.127,29.891 6.52,29.498 R9.1
NetR10_2: R10.2 U1.35 | length 49.5
  Top Layer w0.254: R10.2 7.96,37.133 9.208,35.886 v1(9.208,26.335) ; v1(32.727,20.291) 36.995,16.023 38.621,16.023 39.943,17.345 U1.35
  Bottom Layer w0.254: v1(9.208,26.335) 15.862,19.68 32.116,19.68 v1(32.727,20.291)
NetR11_2: R11.2 U1.34 | length 59.6
  Top Layer w0.254: R11.2 1.42,33.193 1.232,33.193 0.673,32.634 0.673,21.712 0.826,21.56 5.702,21.56 v1(9.512,17.75) ; U1.34 42.609,16.075 43.396,16.862 v1(43.396,17.75)
  Bottom Layer w0.254: v1(9.512,17.75) v1(43.396,17.75)
NetR14_1: R14.1 SW2.1 U1.25 | length 77.1
  Top Layer w0.254: SW2.1 12.318,43.4 R14.1 12.318,39.931 12.611,39.638 18.435,39.638 20.968,37.105 20.968,29.078 17.59,25.7 17.59,21.814 17.894,21.509 18.636,21.509 18.89,21.255 18.89,2.708 20.434,1.164 38.646,1.164 39.637,2.154 39.637,3.78 40.502,4.645 U1.25
NetU1_6: U1.6 U3.22 | length 22.7
  Top Layer w0.254: U3.22 4.191,13.75 v1(4.356,13.584) ; v1(21.603,13.584) 22.823,14.805 U1.6
  Bottom Layer w0.254: v1(4.356,13.584) v1(21.603,13.584)
NetU1_12: U1.12 U3.3 | length 13
  Top Layer w0.254: U3.3 17.094,13.75 18.123,12.721 v1(18.123,11.324) ; v1(22.262,7.185) U1.12
  Bottom Layer w0.254: v1(18.123,11.324) v1(22.262,7.185)
NetU1_29: U1.29 U3.17 | length 45.2
  Top Layer w0.254: U3.17 5.255,20.75 10.557,15.448 v1(10.557,14.473) ; v1(35.396,14.473) 40.145,9.725 U1.29
  Bottom Layer w0.254: v1(10.557,14.473) v1(35.396,14.473)
NetU1_30: U1.30 U3.20 | length 44.2
  Top Layer w0.254: U3.20 2.953,16.55 5.017,18.614 v1(5.017,18.664) ; v1(33.237,18.664) 40.907,10.995 U1.30
  Bottom Layer w0.254: v1(5.017,18.664) v1(33.237,18.664)
NetU1_31: U1.31 U3.19 | length 52.9
  Top Layer w0.254: U3.19 3.01,17.95 3.01,18.233 v1(3.95,19.172) ; v1(40.335,12.759) 40.829,12.265 U1.31
  Bottom Layer w0.254: v1(3.95,19.172) 4.534,19.757 13.526,19.757 14.059,19.223 32.499,19.223 32.688,19.411 43.081,19.411 44.158,18.334 44.158,16.582 v1(40.335,12.759)
NetU1_37: U1.37 U3.18 | length 46.9
  Top Layer w0.254: U3.18 2.426,19.35 2.426,19.934 5.241,19.934 5.764,19.411 v1(5.764,15.286) ; v1(37.73,16.988) 40.627,19.885 U1.37
  Bottom Layer w0.254: v1(5.764,15.286) 36.029,15.286 v1(37.73,16.988)
RTS: Q1.2 R13.2 U4.24 | length 10.6
  Top Layer w0.254: U4.24 6.48,36.089 6.683,36.292 7.836,36.292 8.242,35.886 v1(8.242,35.378) ; v1(11.345,35.835) 11.925,36.415 Q1.2 12.55,36.052 13.961,34.641 R13.2
  Bottom Layer w0.254: v1(8.242,35.378) 10.888,35.378 v1(11.345,35.835)
RXD: R10.1 U4.25 | length 2
  Top Layer w0.254: U4.25 5.98,37.133 R10.1
TXD: R11.1 U4.26 | length 11.6
  Top Layer w0.254: R11.1 v1(1.42,37.003) ; U4.26 5.48,37.918 6.013,38.451 v1(6.718,38.451)
  Bottom Layer w0.254: v1(1.42,37.003) 5.271,37.003 v1(6.718,38.451)
V_USB: C6.2 J2.A4/B9 J2.B4/A9 R8.1 U2.1 U2.3 | length 57.3
  Top Layer w0.4: v1(10.198,38.4) 10.151,38.353 10.151,34.438 R8.1 ; U2.3 32.15,34.463 32.506,34.108 33.744,34.108 34.05,34.414 U2.1 34.05,36.47 34.12,36.54 C6.2 ; J2.B4/A9 33.6,41.448 34.312,40.735 34.312,39.325 34.29,39.14 C6.2 ; v1(34.526,39.111) C6.2 ; v1(38.24,44.649) 38.24,42.625 38.24,42.617 38.4,42.617 J2.A4/B9
  Bottom Layer w0.4: v1(10.198,38.4) 26.708,38.4 33.446,45.138 37.75,45.138 v1(38.24,44.649) 38.24,42.825 v1(34.526,39.111)
pads on no net: C10.2 J2. J2.A8 J2.B8 Q2.3 SW1.3 SW1.4 SW2.3 SW2.4 U1.4 U1.5 U1.7 U1.8 U1.9 U1.10 U1.11 U1.13 U1.14 U1.16 U1.17 U1.18 U1.19 U1.20 U1.21 U1.22 U1.23 U1.24 U1.26 U1.28 U1.32 U1.33 U1.36 U2.4 U3.1 U3.4 U3.9 U3.10 U3.11 U3.12 U3.13 U3.14 U3.15 U4.1 U4.2 U4.10 U4.11 U4.12 U4.13 U4.14 U4.15 U4.16 U4.17 U4.18 U4.19 U4.20 U4.21 U4.22 U4.23 U4.27 U5.1 U5.2 U5.3

## Polygon pours and split planes (outlines as drawn)
GND on Bottom Layer "GND_L02_P003" (solid, pour order 3): 0.4,27.7 20.5,27.7 20.5,39.8 0.4,39.8
GND on Bottom Layer "GND_L02_P002" (solid, pour order 2): 17.4,0.2 0.2,0.2 0.2,27.3 17.5,27.3
GND on Bottom Layer "GND_L02_P001" (solid, pour order 1): 0.3,48.7 0.3,40.1 21.1,40.1 21.1,27.3 18.6,27.3 18.6,0.1 44.8,0.1 44.9,0.2 44.9,48.7

## Keep-outs
Keep-Out Layer:
  lines w0.3: 0,-0.3 45.173,-0.3 45.173,48.9 0,48.9 0,-0.3

## Other copper
Bottom Layer:
  pour cut-out: 32.2,48.6 32.2,43.4 32.3,43.3 39.3,43.3 39.3,48.6

## Dimensions
0,-0.3 to 45.173,-0.3 on Mechanical 1
0,-0.3 to 0,48.9 on Mechanical 1